# Allegro board SMA_fabA.brd
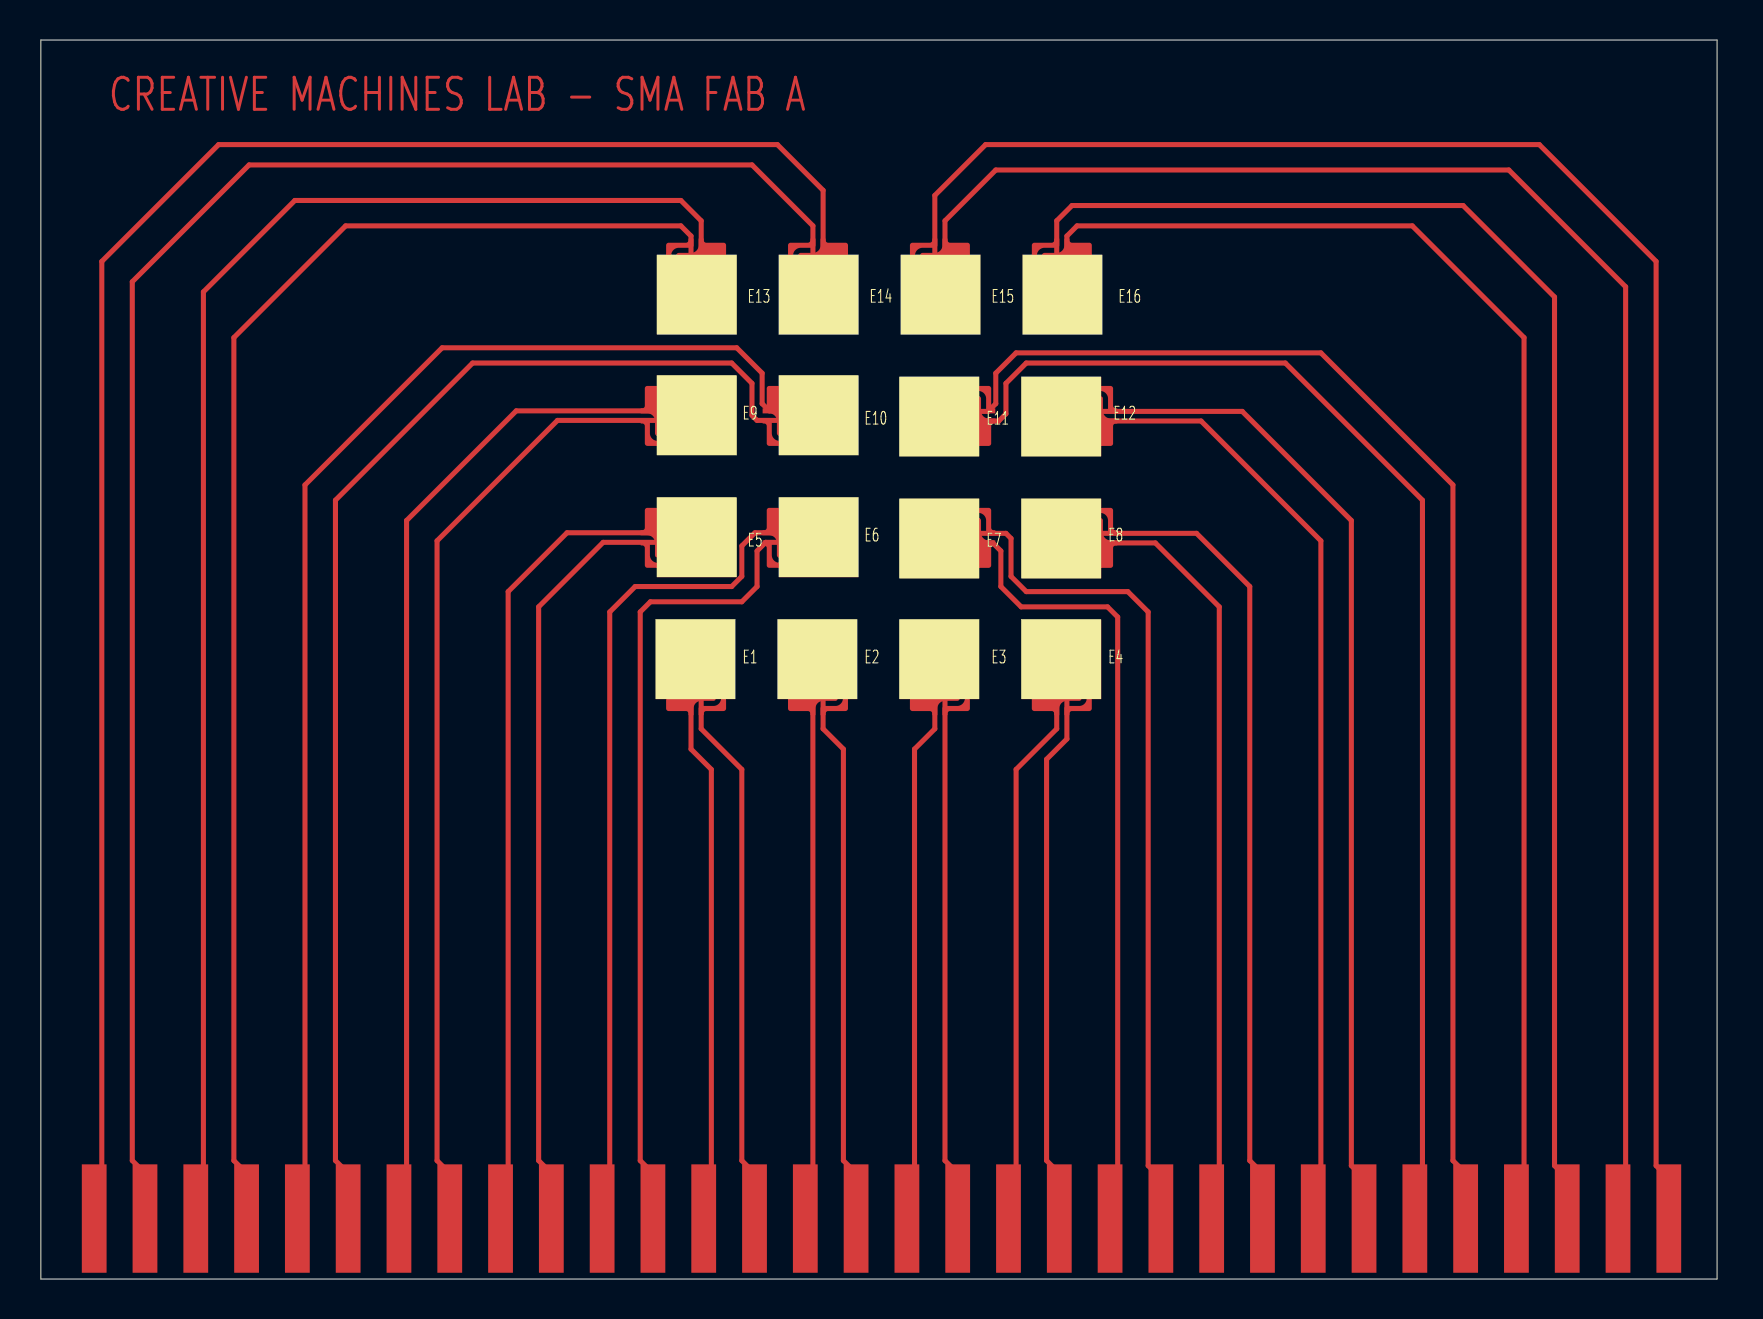
[diagram p0: board, top side]
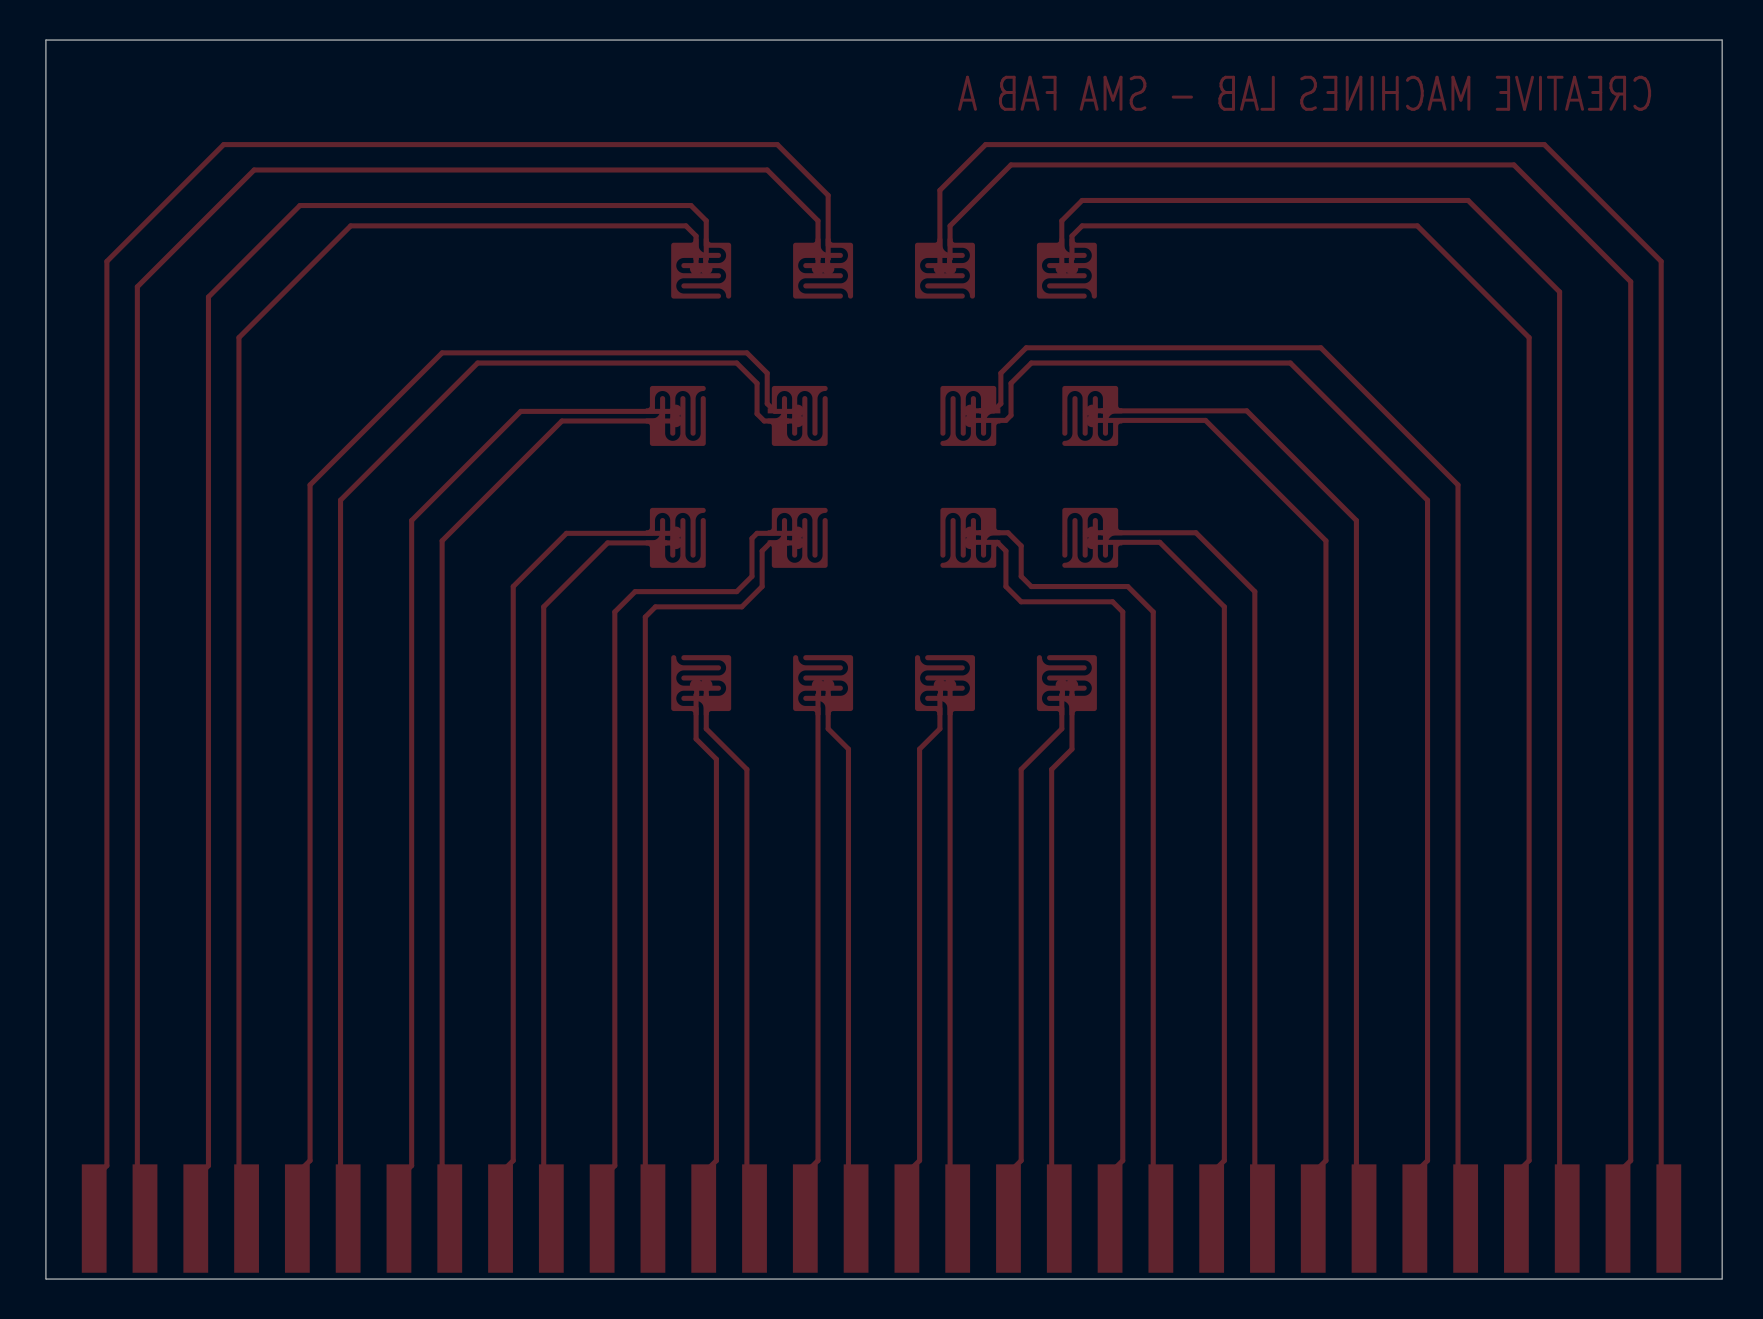
[diagram p1: board, bottom side, seen from below]

Outline 83.82 x 61.95 mm; copper layers: TOP, BOTTOM. Coordinates in mm from the lower left corner of the outline.
Outline path: 0,61.95 0,0 83.82,0 83.82,61.95 0,61.95

## Design rules (mm)
constraint set DEFAULT: min track width 0.127

## Placement (name value [footprint] x y rotation side)
J1  spiral_electrode  [COMB_ELECTRODE]  51.31 43.15 90 top
J2  spiral_electrode  [COMB_ELECTRODE]  45.21 43.15 90 top
J3  spiral_electrode  [COMB_ELECTRODE]  51.05 49.5 180 top
J4  spiral_electrode  [COMB_ELECTRODE]  44.96 49.5 180 top
J5  spiral_electrode  [COMB_ELECTRODE]  44.96 30.71 0 top
J6  spiral_electrode  [COMB_ELECTRODE]  51.05 30.71 0 top
J7  spiral_electrode  [COMB_ELECTRODE]  45.21 37.06 90 top
J8  spiral_electrode  [COMB_ELECTRODE]  51.31 37.06 90 top
J9  comb_electrode  [COMB_ELECTRODE]  32.51 37.06 270 top
J10  comb_electrode  [COMB_ELECTRODE]  38.61 37.06 270 top
J11  comb_electrode  [COMB_ELECTRODE]  32.77 30.71 0 top
J12  comb_electrode  [COMB_ELECTRODE]  38.86 30.71 0 top
J13  comb_electrode  [COMB_ELECTRODE]  38.86 49.5 180 top
J14  comb_electrode  [COMB_ELECTRODE]  32.77 49.5 180 top
J15  comb_electrode  [COMB_ELECTRODE]  38.61 43.15 270 top
J16  comb_electrode  [COMB_ELECTRODE]  32.51 43.15 270 top
J17  edge_connector  [EDGE_CONNECTOR]  42.67 3.02 0 top

## Library data of the parts
J1-J8 = spiral_electrode_0
J9-J16 = comb_electrode
J17 = edge_connector_2

## Footprints (pads in the part's own frame, mm; a bottom-side part is the same pattern mirrored in y, then rotated)
COMB_ELECTRODE
  custom 2.492x3 smd: 1(-0.254,-1.016)
  custom 2.491x3 smd: 2(0.254,-1.016)
EDGE_CONNECTOR
  rect 1.24x5.42 smd: 1(-40.005,0) 2(-37.465,0) 3(-34.925,0) 4(-32.385,0) 5(-29.845,0) 6(-27.305,0) 7(-24.765,0) 8(-22.225,0) 9(-19.685,0) 10(-17.145,0) 11(-14.605,0) 12(-12.065,0) 13(-9.525,0) 14(-6.985,0) 15(-4.445,0) 16(-1.905,0) 17(0.635,0) 18(3.175,0) 19(5.715,0) 20(8.255,0) 21(10.795,0) 22(13.335,0) 23(15.875,0) 24(18.415,0) 25(20.955,0) 26(23.495,0) 27(26.035,0) 28(28.575,0) 29(31.115,0) 30(33.655,0) 31(36.195,0) 32(38.735,0)

## Nets
P0+: J13.1 J17.1
P0-: J13.2(-) J17.2
P1+: J14.1 J17.3
P1-: J14.2(-) J17.4
P2+: J15.1 J17.5
P2-: J15.2(-) J17.6
P3+: J16.1 J17.7
P3-: J16.2(-) J17.8
P4+: J9.1 J17.9
P4-: J9.2(-) J17.10
P5+: J10.1 J17.11
P5-: J10.2(-) J17.12
P6+: J11.1 J17.13
P6-: J11.2(-) J17.14
P7+: J12.1 J17.15
P7-: J12.2(-) J17.16
P8+: J5.1 J17.17
P8-: J5.2(-) J17.18
P9+: J6.1 J17.19
P9-: J6.2(-) J17.20(P9-)
P10+: J7.1 J17.21
P10-: J7.2(-) J17.22
P11+: J8.1 J17.23
P11-: J8.2(-) J17.24
P12+: J1.1 J17.25
P12-: J1.2(-) J17.26
P13+: J2.1 J17.27
P13-: J2.2(-) J17.28
P14+: J3.1 J17.29
P14-: J3.2(-) J17.30
P15+: J4.1 J17.31
P15-: J4.2(-) J17.32

## Routing (per net, layer and track width the routed paths; a pad name or vN(x,y) marks a point on that pad's centre or on a via; arc(x,y) is an arc through that point)
P0+: length 91.4
  TOP w0.254: J13.1 39.12,50.52 39.12,54.43 36.83,56.72 8.89,56.72 3.05,50.88 3.05,3.4 J17.1
P0-: length 87
  TOP w0.254: J17.2 5.21,5.29 4.57,5.92 4.57,49.86 10.41,55.7 35.56,55.7 38.61,52.66 38.61,51.01 38.64,50.98 38.64,50.55 J13.2
P1+: length 76.1
  TOP w0.254: J17.3 8.13,3.4 8.13,49.35 12.7,53.93 32,53.93 33.02,52.91 33.02,50.52 J14.1
P1-: length 71.3
  TOP w0.254: J14.2 32.54,50.55 32.54,50.98 32.51,51.01 32.51,52.15 32,52.66 15.24,52.66 9.65,47.07 9.65,5.92 10.29,5.29 10.29,3.02
P2+: length 66.3
  TOP w0.254: J17.5 13.21,3.4 13.21,39.7 20.07,46.56 34.8,46.56 36.07,45.29 36.07,43.77 36.43,43.41 37.1,43.41 37.59,43.41 J15.1
P2-: length 64
  TOP w0.254: J15.2 37.56,42.93 35.81,42.93 35.56,43.18 35.56,44.78 34.54,45.8 21.59,45.8 14.73,38.94 14.73,5.92 15.37,5.29 J17.6
P3+: length 50.5
  TOP w0.254: J17.7 18.29,3.4 18.29,37.92 23.77,43.41 31,43.41 31.49,43.41 J16.1
P3-: length 48.3
  TOP w0.254: J16.2 31.47,42.93 25.83,42.93 19.81,36.91 19.81,5.92 20.45,5.29 J17.8
P4+: length 40.9
  TOP w0.254: J17.9 23.37,3.4 23.37,34.37 26.31,37.31 31,37.31 31.49,37.31 J9.1
P4-: length 38.8
  TOP w0.254: J9.2 31.47,36.83 28.12,36.83 24.89,33.61 24.89,5.92 25.53,5.29 J17.10
P5+: length 42.2
  TOP w0.254: J10.1 37.59,37.31 37.1,37.31 35.71,37.31 35.05,36.65 35.05,35.13 34.54,34.62 29.72,34.62 28.45,33.35 28.45,3.4 J17.11
P5-: length 40.7
  TOP w0.254: J10.2 37.56,36.83 36.25,36.83 35.81,36.4 35.81,34.62 35.05,33.86 30.48,33.86 29.97,33.35 29.97,5.92 30.61,5.29 30.61,3.02
P6+: length 27.2
  TOP w0.254: J17.13 33.53,3.4 33.53,25.48 32.51,26.49 32.51,29.2 32.51,29.2 32.51,29.69 J11.1
P6-: length 27.8
  TOP w0.254: J17.14 35.69,5.29 35.05,5.92 35.05,25.48 33.02,27.51 33.02,29.2 32.99,29.23 32.99,29.66 J11.2
P7+: length 26.8
  TOP w0.254: J12.1 38.61,29.69 38.61,3.4 J17.15
P7-: length 27.4
  TOP w0.254: J17.16 40.77,5.29 40.13,5.92 40.13,26.49 39.12,27.51 39.12,29.2 39.09,29.23 39.09,29.66 J12.2
P8+: length 27.2
  TOP w0.254: J17.17 43.69,3.4 43.69,26.49 44.7,27.51 44.7,29.2 44.7,29.2 44.7,29.69 J5.1
P8-: length 27
  TOP w0.254: J5.2 45.18,29.66 45.18,29.23 45.21,29.2 45.21,5.92 45.85,5.29 J17.18
P9+: length 27.7
  TOP w0.254: J17.19 48.77,3.4 48.77,25.48 50.8,27.51 50.8,29.2 50.8,29.2 50.8,29.69 J6.1
P9-: length 27.4
  TOP w0.254: J6.2 51.28,29.66 51.28,29.23 51.31,29.2 51.31,27 50.29,25.99 50.29,5.92 50.93,5.29 50.93,3.02
P10+: length 40.4
  TOP w0.254: J17.21 53.85,3.4 53.85,33.1 53.34,33.61 49.02,33.61 48.01,34.62 48.01,36.4 47.6,36.8 46.72,36.8 46.72,36.8 46.23,36.8 J7.1
P10-: length 42.5
  TOP w0.254: 56.01,3.02 56.01,5.03 55.37,5.67 55.37,33.35 54.36,34.37 49.28,34.37 48.51,35.13 48.51,37.03 48.26,37.28 46.26,37.28 J7.2
P11+: length 38.7
  TOP w0.254: J17.23 58.93,3.4 58.93,33.61 55.73,36.8 52.82,36.8 52.82,36.8 52.33,36.8 J8.1
P11-: length 41.1
  TOP w0.254: J17.24 61.09,5.29 60.45,5.92 60.45,34.62 57.79,37.28 52.35,37.28 J8.2
P12+: length 48.2
  TOP w0.254: J1.1 52.33,42.9 58.02,42.9 64.01,36.91 64.01,5.67 63.63,5.29 J17.25
P12-: length 50.6
  TOP w0.254: J1.2 52.35,43.38 60.08,43.38 65.53,37.92 65.53,5.67 66.17,5.03 J17.26
P13+: length 63.9
  TOP w0.254: J2.1 46.23,42.9 46.72,42.9 46.72,42.9 47.9,42.9 48.26,43.26 48.26,44.78 49.28,45.8 62.23,45.8 69.09,38.94 69.09,3.4 J17.27
P13-: length 66.2
  TOP w0.254: J2.2 46.26,43.38 47.36,43.38 47.75,43.77 47.75,45.29 48.77,46.31 64.01,46.31 70.61,39.7 70.61,5.92 71.25,5.29 J17.28
P14+: length 71.2
  TOP w0.254: J17.29 74.17,3.4 74.17,47.07 68.58,52.66 51.82,52.66 51.31,52.15 51.31,51.01 51.31,51.01 51.31,50.52 J3.1
P14-: length 75.9
  TOP w0.254: J17.30 76.33,5.03 75.69,5.67 75.69,49.1 71.12,53.67 51.56,53.67 50.8,52.91 50.8,51.01 50.83,50.98 50.83,50.55 J3.2
P15+: length 86.6
  TOP w0.254: J4.1 45.21,50.52 45.21,51.01 45.21,51.01 45.21,52.91 47.75,55.45 73.41,55.45 79.25,49.61 79.25,3.4 J17.31
P15-: length 91.3
  TOP w0.254: J4.2 44.73,50.55 44.73,50.98 44.7,51.01 44.7,54.18 47.24,56.72 74.93,56.72 80.77,50.88 80.77,5.67 81.41,5.03 J17.32

## Text on the board
User.Comments: 02/17/18 | DATE | 0.1 | REV | FAB A RELEASE | DESCRIPTION | AUTHOR | zq2154 | SMA | CREATIVE MACHINES LAB | A | Edge connector with gold fingers
TOP: CREATIVE MACHINES LAB - SMA FAB A
PAGE_OUTLINE: Materials provided to you regarding Creative Machines Lab's | product designs are confidential and considered intellectual | property. They may not be shared without our permission. | COMPANY: | TITLE: | CONFIDENTIALITY REMINDER: | FAB:
XSECTION_CHART: *  SURFACE - AIR 0 MIL | L1 TOP CONDUCTOR - COPPER 1.2 MIL | *  DIELECTRIC - FR-4 8 MIL | L2 BOTTOM CONDUCTOR - COPPER 1.2 MIL | DESIGN CROSS SECTION CHART | ___________________________ | TOTAL THICKNESS 10.4 MIL
